# Altium PCB conn_board.PcbDoc (part 2 of 2)
Units mm, origin at the board's own origin, x right, y up, seen from the top; angles counter-clockwise.
Board outline 125 x 100 mm, 2 copper layers (Top Layer, Bottom Layer); 85 components, 65 nets, 284 pads, 72 vias.
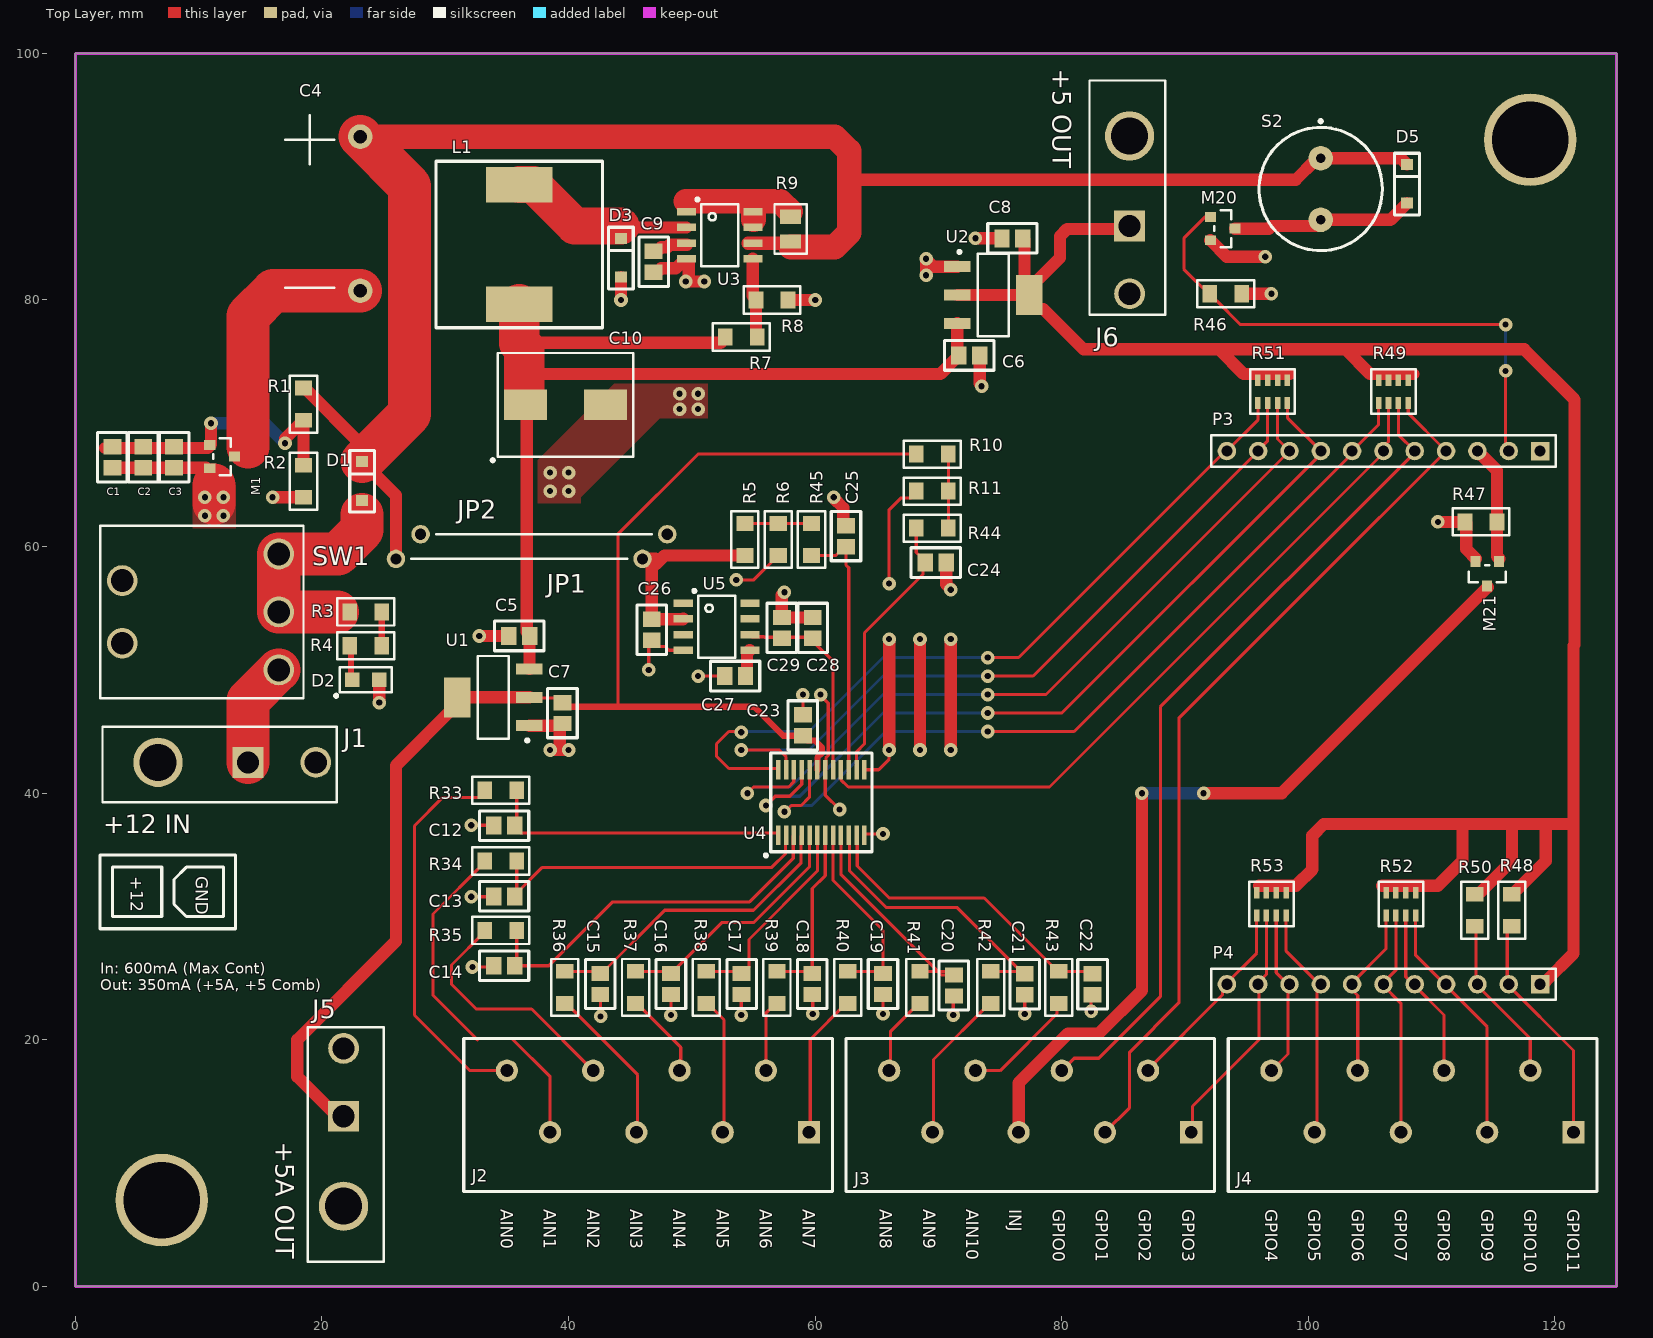
[diagram p0: Top Layer view]

## Part data (continued)
R2: library part ERJ-6ENF1603V, "Res Thick Film 0805 160K Ohm 1% 1/8W ±100ppm/°C Molded SMD Punched Carrier T/R", Case Code (Imperial)=0805, Case Code (Metric)=2012, Manufacturer=Panasonic, Max Operating Temperature=155°C, Max Power Dissipation=125mW, Min Operating Temperature=-55°C, Package Quantity=1, Supplier Part Number 1=P160KCCT-ND, Temperature Coefficient=100ppm/°C, Tolerance=1%, Voltage Rating=150V, Case/Package=0805, Category=Resistor, ComponentLink1Description=https://datasheet.ciiva.com/22674/1678782-22674517.pdf?src-supplier=Element14, ComponentLink1URL=https://datasheet.ciiva.com/22674/1678782-22674517.pdf?src-supplier=Element14, ComponentLink2Description=https://datasheet.ciiva.com/46436/1678782-46436469.pdf?src-supplier=Element14, ComponentLink2URL=https://datasheet.ciiva.com/46436/1678782-46436469.pdf?src-supplier=Element14, ComponentLink3Description=https://datasheet.ciiva.com/46436/1678782-46436470.pdf?src-supplier=Element14, ComponentLink3URL=https://datasheet.ciiva.com/46436/1678782-46436470.pdf?src-supplier=Element14, ComponentLink4Description=https://datasheet.ciiva.com/17207/aoa0000ce2-17207337.pdf?src-supplier=Avnet+Europe, ComponentLink4URL=https://datasheet.ciiva.com/17207/aoa0000ce2-17207337.pdf?src-supplier=Avnet+Europe, ComponentLink5Description=https://datasheet.ciiva.com/9185/aoa0000ce2-9185402.pdf?src-supplier=Avnet, ComponentLink5URL=https://datasheet.ciiva.com/9185/aoa0000ce2-9185402.pdf?src-supplier=Avnet, ComponentLink6Description=https://datasheet.ciiva.com/22739/1678782-22739739.pdf?src-supplier=Element14, ComponentLink6URL=https://datasheet.ciiva.com/22739/1678782-22739739.pdf?src-supplier=Element14, ComponentLink7Description=https://datasheet.ciiva.com/24060/aoa0000ce2-24060654.pdf?src-supplier=Mouser, ComponentLink7URL=https://datasheet.ciiva.com/24060/aoa0000ce2-24060654.pdf?src-supplier=Mouser, ComponentLink8Description=http://datasheet.octopart.com/ERJ-6ENF1603V-Panasonic-datasheet-13266541.pdf?src-supplier=Newark, ComponentLink8URL=http://datasheet.octopart.com/ERJ-6ENF1603V-Panasonic-datasheet-13266541.pdf?src-supplier=Newark, ComponentLink9Description=http://datasheet.octopart.com/ERJ-6ENF1603V-Panasonic-datasheet-48891056.pdf?src-supplier=Farnell, ComponentLink9URL=http://datasheet.octopart.com/ERJ-6ENF1603V-Panasonic-datasheet-48891056.pdf?src-supplier=Farnell, ComponentLink10Description=http://datasheet.octopart.com/ERJ-6ENF1603V-Panasonic-datasheet-136608610.pdf?src-supplier=Farnell, ComponentLink10URL=http://datasheet.octopart.com/ERJ-6ENF1603V-Panasonic-datasheet-136608610.pdf?src-supplier=Farnell, ComponentLink11Description=http://datasheet.octopart.com/ERJ6ENF1603V-Panasonic---ECG-datasheet-5313456.pdf?src-supplier=Element14, ComponentLink11URL=http://datasheet.octopart.com/ERJ6ENF1603V-Panasonic---ECG-datasheet-5313456.pdf?src-supplier=Element14, ComponentLink12Description=http://datasheet.octopart.com/ERJ6ENF1603V-Panasonic---ECG-datasheet-8853621.pdf?src-supplier=Element14, ComponentLink12URL=http://datasheet.octopart.com/ERJ6ENF1603V-Panasonic---ECG-datasheet-8853621.pdf?src-supplier=Element14, ComponentLink13Description=http://datasheet.octopart.com/ERJ6ENF1603V-Panasonic---ECG-datasheet-10025800.pdf?src-supplier=Element14, ComponentLink13URL=http://datasheet.octopart.com/ERJ6ENF1603V-Panasonic---ECG-datasheet-10025800.pdf?src-supplier=Element14, ComponentLink14Description=http://datasheet.octopart.com/ERJ-6ENF1603V-Panasonic-datasheet-41391857.pdf?src-supplier=Electro+Sonic, ComponentLink14URL=http://datasheet.octopart.com/ERJ-6ENF1603V-Panasonic-datasheet-41391857.pdf?src-supplier=Electro+Sonic, ComponentLink15Description=http://datasheet.octopart.com/ERJ-6ENF1603V-Panasonic-datasheet-78375410.pdf, ComponentLink15URL=http://datasheet.octopart.com/ERJ-6ENF1603V-Panasonic-datasheet-78375410.pdf, ComponentLink16Description=http://datasheet.octopart.com/ERJ6ENF1603V-Panasonic---ECG-datasheet-15994758.pdf?src-supplier=Farnell, ComponentLink16URL=http://datasheet.octopart.com/ERJ6ENF1603V-Panasonic---ECG-datasheet-15994758.pdf?src-supplier=Farnell, Composition="Thick Film", Contact Plating=Tin, Depth=1.25mm, Features="Automotive AEC-Q200", Height=0.028inch, Length=2mm, Manufacturer Part Number=ERJ-6ENF1603V, Military Standard=Not, Mount="Surface Mount", Number of Terminations=2, Packaging="Tape and Reel", Power Rating=125mW, Pricing 1="1=0.10000, 10=0.07200, 100=0.02750, 1000=0.01210, 2500=0.01045 (USD)", Radiation Hardening=No, REACH SVHC="No SVHC", Resistance=160kR, Stock 1=46420, Supplier 1=Digi-Key, Termination=SMD/SMT, Width=0.049inch
R3 R4 R33 R34 R35 R36 R37 R38 R39 R40 R41 R42 R43 R44 R45: library part ERA-6AED331V, "Res Thin Film 0805 330 Ohm 0.5% 0.125W(1/8W) ±25ppm/C Molded SMD Automotive Punched T/R", Case Code (Imperial)=0805, Case Code (Metric)=2012, Manufacturer=Panasonic, Max Operating Temperature=155°C, Min Operating Temperature=-55°C, Package Quantity=5000, Power Rating=125mW, Resistor Type="Thin Film", Supplier Part Number 1=P123837CT-ND, Temperature Coefficient=25ppm/°C, Tolerance=0.5%, Voltage Rating=200V, Case/Package=0805, Category=Resistor, ComponentLink1Description=https://datasheet.ciiva.com/24071/aoa0000ce26-197354-24071480.pdf?src-supplier=Mouser, ComponentLink1URL=https://datasheet.ciiva.com/24071/aoa0000ce26-197354-24071480.pdf?src-supplier=Mouser, ComponentLink2Description=https://datasheet.ciiva.com/9182/aoa0000ce26-9182970.pdf?src-supplier=Avnet, ComponentLink2URL=https://datasheet.ciiva.com/9182/aoa0000ce26-9182970.pdf?src-supplier=Avnet, Contact Plating=Tin, Depth=1.25mm, Height=0.5mm, Lead Free="Lead Free", Length=2mm, Manufacturer Part Number=ERA-6AED331V, Military Standard=Not, Mount="Surface Mount", Packaging="Tape and Reel", Pricing 1="1=0.10000, 10=0.09400, 25=0.06480, 50=0.05040, 100=0.03600, 250=0.02808, 500=0.02232, 1000=0.01584 (USD)", Resistance=330R, RoHS=Yes, Stock 1=11862, Supplier 1=Digi-Key, Termination=SMD/SMT, Width=1.25mm
R5 R7 R46 R47 R48 R50: library part ERA-6AED472V, "Res Thin Film 0805 4.7K Ohm 0.5% 0.125W(1/8W) ±25ppm/C Molded SMD Automotive Punched T/R", Case Code (Imperial)=0805, Case Code (Metric)=2012, Manufacturer=Panasonic, Max Operating Temperature=155°C, Min Operating Temperature=-55°C, Package Quantity=5000, Power Rating=125mW, Resistor Type="Metal Film,Thin Film", Supplier Part Number 1=P123914CT-ND, Temperature Coefficient=25ppm/°C, Tolerance=0.5%, Voltage Rating=100V, Case/Package=0805, Category="Chip SMD Resistors", ComponentLink1Description=https://datasheet.ciiva.com/24027/aoa0000ce26-32660-24027576.pdf?src-supplier=Mouser, ComponentLink1URL=https://datasheet.ciiva.com/24027/aoa0000ce26-32660-24027576.pdf?src-supplier=Mouser, Contact Plating=Tin, Depth=1.25mm, Height=0.5mm, Lead Free="Lead Free", Length=2mm, Manufacturer Part Number=ERA-6AED472V, Military Standard=Not, Mount="Surface Mount", Packaging="Tape and Reel", Pricing 1="1=0.10000, 10=0.09400, 100=0.03600, 1000=0.01584, 2500=0.01368 (USD)", Resistance=4.7kR, RoHS=Yes, Stock 1=25343, Supplier 1=Digi-Key, Width=1.25mm
R6 R8 R10 R11: library part ERJ-PB6D1241V, "RES SMD 1.24K OHM 0.5% 1/4W 0805", Case Code (Imperial)=0805, Case Code (Metric)=2012, Manufacturer=Panasonic, Max Operating Temperature=155°C, Max Power Dissipation=250mW, Min Operating Temperature=-55°C, Resistor Type="Thick Film", Supplier Part Number 1=P21029CT-ND, Temperature Coefficient=50ppm/°C, Tolerance=0.5%, Case/Package=0805, Category="Chip SMD Resistors", ComponentLink1Description=https://industrial.panasonic.com/sa/system/files/data/download/catalog/id_fixed-resistors_e_2.pdf?src-supplier=Digi-Key, ComponentLink1URL=https://industrial.panasonic.com/sa/system/files/data/download/catalog/id_fixed-resistors_e_2.pdf?src-supplier=Digi-Key, ComponentLink2Description=https://industrial.panasonic.com/cdbs/www-data/pdf/RDM0000/DMM0000COL5.pdf?src-supplier=Digi-Key, ComponentLink2URL=https://industrial.panasonic.com/cdbs/www-data/pdf/RDM0000/DMM0000COL5.pdf?src-supplier=Digi-Key, Features="Automotive AEC-Q200", Height - Seated (Max)=0.028inch, Length=0.079inch, Manufacturer Part Number=ERJ-PB6D1241V, Number of Terminations=2, Packaging="Tape and Reel", Pricing 1="1=0.23000, 10=0.19100, 25=0.13920, 50=0.10100, 100=0.07480, 250=0.05744, 500=0.04524, 1000=0.03132 (USD)", Resistance=1.24kR, RoHS=Yes, Stock 1=777, Supplier 1=Digi-Key, Width=0.049inch
R9: library part CSR1206FKR250, "Res Thick Film 1206 250m Ohm 1% 1/2W 100ppm/C Molded SMD Paper T/R", Case Code (Imperial)=1206, Case Code (Metric)=3216, Manufacturer="Stackpole Electronics", Max Operating Temperature=155°C, Max Power Dissipation=500mW, Min Operating Temperature=-55°C, Resistor Type="Thick Film", Supplier Part Number 1=CSR1206FKR250CT-ND, Temperature Coefficient=100ppm/°C, Tolerance=1%, Case/Package=1206, Category="Chip SMD Resistors", ComponentLink1Description=https://www.seielect.com/catalog/SEI-Packaging.pdf?src-supplier=Digi-Key, ComponentLink1URL=https://www.seielect.com/catalog/SEI-Packaging.pdf?src-supplier=Digi-Key, ComponentLink2Description=https://www.seielect.com/catalog/SEI-CSR_CSRN.pdf?src-supplier=Avnet+Asia, ComponentLink2URL=https://www.seielect.com/catalog/SEI-CSR_CSRN.pdf?src-supplier=Avnet+Asia, Contact Plating=Tin,Matte, Height=0.026inch, Lead Free="Lead Free", Length=0.12inch, Manufacturer Part Number=CSR1206FKR250, Mount="Surface Mount", Number of Terminations=2, Packaging="Tape and Reel", Power Rating=500mW, Pricing 1="1=0.41000, 10=0.31100, 25=0.23640, 50=0.17560, 100=0.13050, 250=0.11024, 500=0.09450 (USD)", Resistance=250mR, RoHS=Yes, Stock 1=244191, Supplier 1=Digi-Key, Termination=Wraparound, Width=0.061inch
R49 R51 R52 R53: library part CAY16-472J4LF, "RES ARRAY 4 RES 4.7K OHM 1206", Case Code (Imperial)=1206, Case Code (Metric)=3216, Manufacturer=Bourns, Max Operating Temperature=125°C, Min Operating Temperature=-55°C, Number of Resistors=4, Package Quantity=1, Power Per Element=62.5mW, Power Rating=248mW, Supplier Part Number 1=CAY16-472J4LFCT-ND, Temperature Coefficient=200ppm/°C, Tolerance=5%, Voltage Rating=50V, Case/Package=1206, Category=Resistor, Circuit Type=Isolated, ComponentLink1Description=https://datasheet.ciiva.com/19466/1979708-19466930.pdf?src-supplier=Jameco, ComponentLink1URL=https://datasheet.ciiva.com/19466/1979708-19466930.pdf?src-supplier=Jameco, ComponentLink2Description=https://datasheet.ciiva.com/11807/0900766b8064e462-11807155.pdf?src-supplier=RSComponents, ComponentLink2URL=https://datasheet.ciiva.com/11807/0900766b8064e462-11807155.pdf?src-supplier=RSComponents, ComponentLink3Description=https://datasheet.ciiva.com/1478/1849489-1478912.pdf?src-supplier=Element14, ComponentLink3URL=https://datasheet.ciiva.com/1478/1849489-1478912.pdf?src-supplier=Element14, ComponentLink4Description=https://datasheet.ciiva.com/25907/catcay-25907158.pdf?src-supplier=Avnet+Europe, ComponentLink4URL=https://datasheet.ciiva.com/25907/catcay-25907158.pdf?src-supplier=Avnet+Europe, ComponentLink5Description=https://datasheet.ciiva.com/30249/catcay-30249688.pdf?src-supplier=Onlinecomponents.com, ComponentLink5URL=https://datasheet.ciiva.com/30249/catcay-30249688.pdf?src-supplier=Onlinecomponents.com, ComponentLink6Description=https://datasheet.ciiva.com/6494/catcay-6494015.pdf?src-supplier=Digi-Key, ComponentLink6URL=https://datasheet.ciiva.com/6494/catcay-6494015.pdf?src-supplier=Digi-Key, ComponentLink7Description=https://datasheet.ciiva.com/3264/catcay-3264889.pdf?src-supplier=Avnet, ComponentLink7URL=https://datasheet.ciiva.com/3264/catcay-3264889.pdf?src-supplier=Avnet, ComponentLink8Description=https://datasheet.ciiva.com/3263/catcay-3263770.pdf?src-supplier=Avnet, ComponentLink8URL=https://datasheet.ciiva.com/3263/catcay-3263770.pdf?src-supplier=Avnet, ComponentLink9Description=https://datasheet.ciiva.com/1478/1849489-1478911.pdf?src-supplier=Element14, ComponentLink9URL=https://datasheet.ciiva.com/1478/1849489-1478911.pdf?src-supplier=Element14, Composition="Thick Film", Contact Plating=Tin, Depth=1.6mm, Height=0.024inch, Length=3.2mm, Manufacturer Part Number=CAY16-472J4LF, Military Standard=Not, Mount="Surface Mount", Number of Circuits=4, Number of Elements=4, Number of Pins=8, Number of Terminals=8, Packaging="Tape and Reel", Pricing 1="1=0.10000, 10=0.06900, 25=0.04760, 50=0.03720, 100=0.02650, 250=0.02068, 500=0.01644, 1000=0.01166 (USD)", Radiation Hardening=No, REACH SVHC="No SVHC", Resistance=4.7kR, RoHS=Yes, Stock 1=28152, Supplier 1=Digi-Key, Terminal Pitch=0.8mm, Termination=Convex, Voltage Rating (DC)=50V, Width=0.063inch
S2: "Buzzers Indicator, Internally Driven Magnetic 12V 30mA 2.7kHz 80dB @ 12V, 10cm Through Hole PC Pins", Manufacturer=CUI, Supplier Part Number 1=102-CMI-9605-1280T-ND, Category="Audio Products", Manufacturer Part Number=CMI-9605-1280T, Pricing 1="1=1.22000, 10=1.01900, 25=0.94360, 50=0.88800, 100=0.83460, 500=0.71806, 1000=0.67126, 5000=0.65780 (USD)", RoHS=No, Stock 1=2147, Supplier 1=Digi-Key
SW1: library part 100SP1T2B4M6QE, "Switch Toggle ON None ON SPDT Round Lever PC Pins 5A 250VAC 28VDC PC Mount with Bracket", Contact Resistance=100mR, Current Rating=5A, Manufacturer=E-Switch, Max Operating Temperature=85°C, Max Voltage Rating (AC)=250V, Max Voltage Rating (DC)=28V, Min Operating Temperature=-30°C, Package Quantity=1, Supplier Part Number 1=EG2362-ND, Voltage Rating (AC)=120V, Actuator Length=6.46mm, Actuator Material=Brass, Actuator Type="Standard Round", Category=Switch, ComponentLink1Description=https://datasheet.ciiva.com/2904/t111069-2904823.pdf?src-supplier=Digi-Key, ComponentLink1URL=https://datasheet.ciiva.com/2904/t111069-2904823.pdf?src-supplier=Digi-Key, ComponentLink2Description=https://datasheet.ciiva.com/16154/100-16154566.pdf?src-supplier=Onlinecomponents.com, ComponentLink2URL=https://datasheet.ciiva.com/16154/100-16154566.pdf?src-supplier=Onlinecomponents.com, ComponentLink3Description=http://datasheet.octopart.com/100SP1T2B4M6QE-E-Switch-datasheet-501321.pdf?src-supplier=Electro+Sonic, ComponentLink3URL=http://datasheet.octopart.com/100SP1T2B4M6QE-E-Switch-datasheet-501321.pdf?src-supplier=Electro+Sonic, ComponentLink4Description=http://datasheet.octopart.com/100SP1T2B4M6QE-E-Switch-datasheet-41351065.pdf?src-supplier=Farnell, ComponentLink4URL=http://datasheet.octopart.com/100SP1T2B4M6QE-E-Switch-datasheet-41351065.pdf?src-supplier=Farnell, ComponentLink5Description=http://datasheet.octopart.com/100SP1T2B4M6QE-E-Switch-datasheet-112052116.pdf?src-supplier=Electro+Sonic, ComponentLink5URL=http://datasheet.octopart.com/100SP1T2B4M6QE-E-Switch-datasheet-112052116.pdf?src-supplier=Electro+Sonic, ComponentLink6Description=http://datasheet.octopart.com/100SP1T2B4M6QE-E-Switch-datasheet-26830754.pdf?src-supplier=Electro+Sonic, ComponentLink6URL=http://datasheet.octopart.com/100SP1T2B4M6QE-E-Switch-datasheet-26830754.pdf?src-supplier=Electro+Sonic, ComponentLink7Description=http://datasheet.octopart.com/100SP1T2B4M6QE-E-Switch-datasheet-62101310.pdf?src-supplier=Electro+Sonic, ComponentLink7URL=http://datasheet.octopart.com/100SP1T2B4M6QE-E-Switch-datasheet-62101310.pdf?src-supplier=Electro+Sonic, Contact Material=Silver, Contact Plating=Silver, Electrical Life=40000Cycles, Housing Material="Stainless Steel", Illumination Type=Non-Illuminated, Lead Free="Lead Free", Length=12.7mm, Manufacturer Part Number=100SP1T2B4M6QE, Mount="Through Hole", Orientation="Right Angle", Packaging=Bulk, Pricing 1="1=3.01000, 10=2.69700, 25=2.54800, 50=2.43620, 100=2.31200, 250=2.21256, 500=2.03852, 1000=1.93908 (USD)", Stock 1=3257, Supplier 1=Digi-Key, Switch Function=On-On, Termination="PC Pin", Throw Configuration=SPDT, Voltage Rating (DC)=28V, Width=6.86mm
U1 U2: "LDL1117 Series 1.2 A 5 V High PSRR LDO Linear Voltage Regulator - SOT-223", Case/Package=TO-261-4, Dropout Voltage=600mV, Manufacturer=STMicroelectronics, Max Input Voltage=18V, Max Operating Temperature=125°C, Min Operating Temperature=-40°C, Min Output Voltage=5V, Output Current=1.2A, Power Supply Rejection Ratio (PSRR)=65dB, Quiescent Current=500uA, Supplier Part Number 1=497-17240-1-ND, Category=IC, ComponentLink1Description=http://www.farnell.com/datasheets/2259188.pdf?src-supplier=Farnell, ComponentLink1URL=http://www.farnell.com/datasheets/2259188.pdf?src-supplier=Farnell, ComponentLink2Description=http://www.st.com/content/ccc/resource/technical/document/datasheet/group3/0e/5a/00/ca/10/1a/4f/a5/DM00366442/files/DM00366442.pdf/jcr:content/translations/en.DM00366442.pdf?src-supplier=Digi-Key, ComponentLink2URL=http://www.st.com/content/ccc/resource/technical/document/datasheet/group3/0e/5a/00/ca/10/1a/4f/a5/DM00366442/files/DM00366442.pdf/jcr:content/translations/en.DM00366442.pdf?src-supplier=Digi-Key, ComponentLink3Description=http://www.farnell.com/datasheets/2259188.pdf?src-supplier=Newark, ComponentLink3URL=http://www.farnell.com/datasheets/2259188.pdf?src-supplier=Newark, ComponentLink4Description=http://datasheet.octopart.com/LDL1117S50R-STMicroelectronics-datasheet-82510909.pdf?src-supplier=Farnell, ComponentLink4URL=http://datasheet.octopart.com/LDL1117S50R-STMicroelectronics-datasheet-82510909.pdf?src-supplier=Farnell, ComponentLink5Description=http://datasheet.octopart.com/LDL1117S50R-STMicroelectronics-datasheet-93404513.pdf?src-supplier=Ciiva+Crawler, ComponentLink5URL=http://datasheet.octopart.com/LDL1117S50R-STMicroelectronics-datasheet-93404513.pdf?src-supplier=Ciiva+Crawler, Manufacturer Part Number=LDL1117S50R, Mount="Surface Mount", Number of Regulators=1, Output Configuration=Positive, Output Type=Fixed, Packaging="Tape and Reel", Pricing 1="1=0.48000, 10=0.36000, 25=0.32440, 100=0.17700, 250=0.17112, 500=0.15340, 1000=0.11800 (USD)", Stock 1=653, Supplier 1=Digi-Key
U3: "1.5-A peak boost/buck/inverting switching regulator 8-SOIC -40 to 85", Case/Package=D, Manufacturer="Texas Instruments", Max Input Voltage=40V, Max Operating Temperature=85°C, Max Output Current=750mA, Min Input Voltage=3V, Min Operating Temperature=-40°C, Min Output Voltage=1.25V, Output Current=1.5A, Package Quantity=1, Quiescent Current=4mA, Supplier Part Number 1=296-17763-1-ND, Switching Frequency=100kHz, Category=IC, ComponentLink1Description=https://datasheet.ciiva.com/41462/001014422-da-01-en-ic-reg-buck-boost-mc33063adr-soic-8-tid-41462284.pdf?src-supplier=Conrad, ComponentLink1URL=https://datasheet.ciiva.com/41462/001014422-da-01-en-ic-reg-buck-boost-mc33063adr-soic-8-tid-41462284.pdf?src-supplier=Conrad, ComponentLink2Description=https://datasheet.ciiva.com/26897/mc33063adr-26897702.pdf?src-supplier=IIIC, ComponentLink2URL=https://datasheet.ciiva.com/26897/mc33063adr-26897702.pdf?src-supplier=IIIC, ComponentLink3Description=https://datasheet.ciiva.com/7993/1862376-7993641.pdf?src-supplier=Element14, ComponentLink3URL=https://datasheet.ciiva.com/7993/1862376-7993641.pdf?src-supplier=Element14, ComponentLink4Description=https://datasheet.ciiva.com/7408/1862376-7408058.pdf?src-supplier=Newark, ComponentLink4URL=https://datasheet.ciiva.com/7408/1862376-7408058.pdf?src-supplier=Newark, ComponentLink5Description=https://datasheet.ciiva.com/46419/1803417-46419179.pdf?src-supplier=Element14, ComponentLink5URL=https://datasheet.ciiva.com/46419/1803417-46419179.pdf?src-supplier=Element14, ComponentLink6Description=https://datasheet.ciiva.com/2025/mc33063a-2025164.pdf?src-supplier=Digi-Key, ComponentLink6URL=https://datasheet.ciiva.com/2025/mc33063a-2025164.pdf?src-supplier=Digi-Key, ComponentLink7Description=https://datasheet.ciiva.com/2025/mc33063a-2025165.pdf?src-supplier=Digi-Key, ComponentLink7URL=https://datasheet.ciiva.com/2025/mc33063a-2025165.pdf?src-supplier=Digi-Key, ComponentLink8Description=https://datasheet.ciiva.com/2025/mc33063a-2025166.pdf?src-supplier=Digi-Key, ComponentLink8URL=https://datasheet.ciiva.com/2025/mc33063a-2025166.pdf?src-supplier=Digi-Key, ComponentLink9Description=https://octopart.com/click/track?ai=8629&ct=datasheets&sig=0128011&at=physicalpart&sid=370&ppid=525094&hlid=24898548&src-supplier=TI+store, ComponentLink9URL=https://octopart.com/click/track?ai=8629&ct=datasheets&sig=0128011&at=physicalpart&sid=370&ppid=525094&hlid=24898548&src-supplier=TI+store, ComponentLink10Description=http://datasheet.octopart.com/MC33063ADR-Texas-Instruments-datasheet-37140769.pdf?src-supplier=Farnell, ComponentLink10URL=http://datasheet.octopart.com/MC33063ADR-Texas-Instruments-datasheet-37140769.pdf?src-supplier=Farnell, ComponentLink11Description=http://datasheet.octopart.com/MC33063ADR-Texas-Instruments-datasheet-149237.pdf?src-supplier=TI+store, ComponentLink11URL=http://datasheet.octopart.com/MC33063ADR-Texas-Instruments-datasheet-149237.pdf?src-supplier=TI+store, ComponentLink12Description=http://datasheet.octopart.com/MC33063ADR-Texas-Instruments-datasheet-149238.pdf?src-supplier=TI+store, ComponentLink12URL=http://datasheet.octopart.com/MC33063ADR-Texas-Instruments-datasheet-149238.pdf?src-supplier=TI+store, ComponentLink13Description=http://datasheet.octopart.com/MC33063ADR-Texas-Instruments-datasheet-149239.pdf?src-supplier=TI+store, ComponentLink13URL=http://datasheet.octopart.com/MC33063ADR-Texas-Instruments-datasheet-149239.pdf?src-supplier=TI+store, ComponentLink14Description=http://datasheet.octopart.com/MC33063ADR-Texas-Instruments-datasheet-149240.pdf?src-supplier=TI+store, ComponentLink14URL=http://datasheet.octopart.com/MC33063ADR-Texas-Instruments-datasheet-149240.pdf?src-supplier=TI+store, ComponentLink15Description=http://datasheet.octopart.com/MC33063ADR-Texas-Instruments-datasheet-149241.pdf?src-supplier=TI+store, ComponentLink15URL=http://datasheet.octopart.com/MC33063ADR-Texas-Instruments-datasheet-149241.pdf?src-supplier=TI+store, ComponentLink16Description=http://datasheet.octopart.com/MC33063ADR-Texas-Instruments-datasheet-10254267.pdf?src-supplier=TI+store, ComponentLink16URL=http://datasheet.octopart.com/MC33063ADR-Texas-Instruments-datasheet-10254267.pdf?src-supplier=TI+store, ComponentLink17Description=http://sigma.octopart.com/49249642/technical_drawing/Texas-Instruments-MC33063ADR.pdf?src-supplier=TI+store, ComponentLink17URL=http://sigma.octopart.com/49249642/technical_drawing/Texas-Instruments-MC33063ADR.pdf?src-supplier=TI+store, ComponentLink18Description=http://datasheet.octopart.com/MC33063ADR-Texas-Instruments-datasheet-12606816.pdf?src-supplier=Farnell, ComponentLink18URL=http://datasheet.octopart.com/MC33063ADR-Texas-Instruments-datasheet-12606816.pdf?src-supplier=Farnell, ComponentLink19Description=http://datasheet.octopart.com/MC33063ADR-Texas-Instruments-datasheet-81639027.pdf?src-supplier=Farnell, ComponentLink19URL=http://datasheet.octopart.com/MC33063ADR-Texas-Instruments-datasheet-81639027.pdf?src-supplier=Farnell, ComponentLink20Description=http://datasheet.octopart.com/MC33063ADR-Texas-Instruments-datasheet-23714746.pdf?src-supplier=Newark, ComponentLink20URL=http://datasheet.octopart.com/MC33063ADR-Texas-Instruments-datasheet-23714746.pdf?src-supplier=Newark, ComponentLink21Description=http://datasheet.octopart.com/MC33063ADR-Texas-Instruments-datasheet-33038661.pdf?src-supplier=Element14, ComponentLink21URL=http://datasheet.octopart.com/MC33063ADR-Texas-Instruments-datasheet-33038661.pdf?src-supplier=Element14, ComponentLink22Description=http://datasheet.octopart.com/MC33063ADR.-Texas-Instruments-datasheet-58444985.pdf?src-supplier=Element14, ComponentLink22URL=http://datasheet.octopart.com/MC33063ADR.-Texas-Instruments-datasheet-58444985.pdf?src-supplier=Element14, ComponentLink23Description=http://datasheet.octopart.com/MC33063ADR.-Texas-Instruments-datasheet-65572232.pdf?src-supplier=Element14, ComponentLink23URL=http://datasheet.octopart.com/MC33063ADR.-Texas-Instruments-datasheet-65572232.pdf?src-supplier=Element14, ComponentLink24Description=http://datasheet.octopart.com/MC33063ADR-Texas-Instruments-datasheet-12052.pdf?src-supplier=Newark, ComponentLink24URL=http://datasheet.octopart.com/MC33063ADR-Texas-Instruments-datasheet-12052.pdf?src-supplier=Newark, ComponentLink25Description=http://datasheet.octopart.com/MC33063ADR-Texas-Instruments-datasheet-137654.pdf?src-supplier=Digi-Key, ComponentLink25URL=http://datasheet.octopart.com/MC33063ADR-Texas-Instruments-datasheet-137654.pdf?src-supplier=Digi-Key, ComponentLink26Description=http://datasheet.octopart.com/MC33063ADR-Texas-Instruments-datasheet-8883959.pdf?src-supplier=Element14, ComponentLink26URL=http://datasheet.octopart.com/MC33063ADR-Texas-Instruments-datasheet-8883959.pdf?src-supplier=Element14, ComponentLink27Description=http://datasheet.octopart.com/MC33063ADR-Texas-Instruments-datasheet-11768196.pdf?src-supplier=Arrow, ComponentLink27URL=http://datasheet.octopart.com/MC33063ADR-Texas-Instruments-datasheet-11768196.pdf?src-supplier=Arrow, ComponentLink28Description=http://datasheet.octopart.com/MC33063ADR-Texas-Instruments-datasheet-14045796.pdf?src-supplier=IIIC, ComponentLink28URL=http://datasheet.octopart.com/MC33063ADR-Texas-Instruments-datasheet-14045796.pdf?src-supplier=IIIC, Contact Plating=Gold, Lead Free="Lead Free", Manufacturer Part Number=MC33063ADR, Max Output Voltage=40V, Number of Outputs=1, Number of Pins=8, Output Type=Adjustable, Output Voltage=40V, Packaging="Tape and Reel", Pricing 1="1=0.44000, 10=0.37500, 25=0.35000, 100=0.26000, 250=0.22000, 500=0.21000, 1000=0.15500 (USD)", REACH SVHC="No SVHC", Stock 1=130093, Supplier 1=Digi-Key, Synchronous Rectifier=No, Termination=SMD/SMT, Topology=Flyback, Weight=0.002561oz
U4: "GLOVE, POLYAMIDE, L/FREE, PU, SIZE 6 - More Details", Case/Package=QSOP, Manufacturer=Maxim, Max Operating Temperature=85°C, Max Power Dissipation=762mW, Min Operating Temperature=-40°C, Operating Supply Voltage=5.25V, Package Quantity=50, Supplier Part Number 1=MAX11624EEG+-ND, Category=IC, ComponentLink1Description=https://datasheet.ciiva.com/16611/max11618-max11625-16611389.pdf?src-supplier=Avnet+Europe, ComponentLink1URL=https://datasheet.ciiva.com/16611/max11618-max11625-16611389.pdf?src-supplier=Avnet+Europe, ComponentLink2Description=https://datasheet.ciiva.com/3039/max11618-max11625-3039027.pdf?src-supplier=Avnet, ComponentLink2URL=https://datasheet.ciiva.com/3039/max11618-max11625-3039027.pdf?src-supplier=Avnet, Conversion Rate=300KS/s, Interface=SPI,Serial, Manufacturer Part Number=MAX11624EEG+, Mount="Surface Mount", Number of A/D Converters=1, Number of Analog Inputs=16, Number of Bits=10, Number of Channels=16, Number of Converters=1, Number of Pins=24, Packaging=Rail/Tube, Polarity=Unipolar, Pricing 1="1=6.76000, 10=6.11000, 25=5.82520, 100=4.83080, 250=4.82100 (USD)", Radiation Hardening=No, Resolution=10b, RoHS=Yes, Sampling Rate=300000S/s, Signal to Noise Ratio (SNR)=49dB, Stock 1=35, Supplier 1=Digi-Key, Supply Type=Single
U5: "TEXAS INSTRUMENTS - REF5050AIDR - VOLTAGE REF, SERIES, 5V, SOIC-8", Case/Package=D, Manufacturer="Texas Instruments", Max Input Voltage=18V, Max Operating Temperature=125°C, Max Output Current=10mA, Min Input Voltage=5.2V, Min Operating Temperature=-40°C, Min Output Voltage=5V, Nominal Supply Current=800uA, Operating Supply Current=1.2mA, Package Quantity=2500, Quiescent Current=1mA, Supplier Part Number 1=296-39167-1-ND, Temperature Coefficient=3ppm/°C, Tolerance=0.1%, Category="Voltage References", ComponentLink1Description=https://datasheet.ciiva.com/4065/43001021s8324725n7713-4065643.pdf?src-supplier=Arrow+Electronics, ComponentLink1URL=https://datasheet.ciiva.com/4065/43001021s8324725n7713-4065643.pdf?src-supplier=Arrow+Electronics, ComponentLink2Description=https://datasheet.ciiva.com/3236/ref5050-3236312.pdf?src-supplier=Avnet, ComponentLink2URL=https://datasheet.ciiva.com/3236/ref5050-3236312.pdf?src-supplier=Avnet, ComponentLink3Description=https://datasheet.ciiva.com/2012/ref5020-2012761.pdf?src-supplier=Digi-Key, ComponentLink3URL=https://datasheet.ciiva.com/2012/ref5020-2012761.pdf?src-supplier=Digi-Key, Lead Free="Lead Free", Manufacturer Part Number=REF5050AIDR, Number of Channels=1, Number of Pins=8, Output Current=10mA, Output Type=Fixed, Output Voltage=5V, Packaging="Tape and Reel", Pricing 1="1=2.92000, 10=2.61800, 25=2.47520, 100=2.03500, 250=1.82600, 500=1.76000, 1000=1.46300 (USD)", Radiation Hardening=No, REACH SVHC="No SVHC", Reference Type=Series, Reference Voltage=5V, RoHS=Yes, Stock 1=3640, Supplier 1=Digi-Key, Weight=0.002677oz

## Free pads (board coordinates)
  round 7.5 hole 6.2 unplated mask+0.06: MNT1(7,7) MNT2(118,93)

## Via types
v1: diameter 1.1, hole 0.5, Top Layer to Bottom Layer, 72 vias

## Nets (pads, with @x,y where several pads share a name; then routed paths per layer and width w, separated by ;. In a path a pad name is that pad's centre, name@x,y a point inside that pad or via, vN(x,y) a via of type N, cw(c..) or ccw(c..) an arc to the next point about the centre after c; other vN are vias at no path point)
5VREF: C28.2 C29.2 U4.17 U5.6 | length 16.5
  Top Layer w0.254: U5.6 54.873,52.692 55.852,52.692 55.894,52.65 57,52.65 59.5,52.65 59.6,52.65 60.098,52.152 60.098,52.052 61.452,50.697 U4.17
6VDCDC: C5.2 C6.2 C10.1 L1.1 R7.1 U1.3 U2.3 | length 84.8
  Top Layer w1: 36,76.525 52.325,76.525 52.7,76.9 R7.1 ; 36.4,74 70.15,74 71.425,75.275 71.525,75.275 71.65,75.4 C6.2 71.525,75.625 71.525,76.05 U2.3 ; C10.1 36.6,71.4 36.6,53.1 36.725,52.975 36.725,52.875 C5.2 36.837,52.738 36.837,50.088 U1.3
  Top Layer w3.3: L1.1 36,76.525 36,76.5 36.4,76.1 36.4,74 C10.1@36.4,72.1
12VDO: C4.1 C26.2 D1.1 D5.1 JP1.1 JP1.2 R1.1 R5.2 R9.1 S2.1 U3.6 U5.2 | length 163.3
  Top Layer w1: R1.1 18.6,72.85 23.25,68.2 D1.1 26,64.15 JP1.2 ; JP1.1 47.027,59 47.263,58.763 ; U5.2 49.282,54.117 46.767,54.117 C26.2 46.75,58.25 47.263,58.763 ; R5.2 47.777,59.277 47.263,58.763 ; 62.75,89.75 98.979,89.75 100.538,91.309 S2.1@100.729,91.309 ; S2.1 107.5,91.5 D5.1
  Top Layer w1.1: U3.6@54.575,84.615 U3.6 R9.1@57.41,84.615
  Top Layer w2: C4.1 61.578,93.25 62.75,92.078 62.75,89.75 62.75,85.472 61.578,84.3 R9.1@58.025,84.3
  Top Layer w3.5: C4.1 27.1,89.25 27.1,70.75 D1.1
+5: C8.2 J6.1 P4.1 R48.2 R49.2 R49.4 R49.6 R49.8 R50.2 R51.2 R51.4 R51.6 R51.8 R52.2 R52.4 R52.6 R52.8 R53.2 R53.4 R53.6 R53.8 U2.2 | length 185.1
  Top Layer w1: U2.2@71.525,80.4 76.975,80.4 U2.2@77.375,80.4 ; C8.2 76.975,84.875 U2.2@76.975,80.8 ; J6.1 85.25,85.75 80.436,85.75 79.85,85.164 79.85,83.425 77.375,80.95 U2.2@77.375,80.4 ; 96,32.5 99,32.5 100.321,33.821 100.321,36.571 101.25,37.5 112.5,37.5 ; 98.5,74 98.3,74 97.5,74 96.7,74 95.9,74 94.75,74 92.75,76 ; 106,32.5 110.5,32.5 112.5,34.5 112.5,37.5 ; 108.5,74 108.1,74 107.3,74 106.5,74 105.7,74 105,74 103,76 ; R50.2 113.6,31.9 113.9,31.9 116.518,34.518 116.518,37.5 ; R48.2 116.6,31.8 116.7,31.9 116.7,31.95 119.25,34.5 119.25,37.5 ; P4.1@118.747,24.577 118.92,24.75 119.25,24.75 121.5,27 121.5,37.5 ; U2.2@77.375,80.4 77.375,79.85 77.95,79.275 78.5,79.275 81.775,76 92.75,76 ; 92.75,76 103,76 ; 103,76 117.5,76 121.586,71.914 121.586,52.04 121.5,51.954 121.5,37.5 ; 112.5,37.5 116.518,37.5 ; 116.518,37.5 119.25,37.5 ; 119.25,37.5 121.5,37.5
+5A: C7.2 C23.1 J5.1 R10.2 U1.2 U4.19 | length 115.2
  Top Layer w0.254: U1.2@36.825,47.775 36.875,47.725 C7.2@39.025,47.725 ; 44,47 44,61 50.5,67.5 R10.2
  Top Layer w0.508: C7.2 39.85,47 44,47 55.068,47 57.418,44.65 C23.1 59.371,44.279 59.961,44.279 60.552,43.688 60.552,43.267 60.183,42.898 60.183,41.911 U4.19
  Top Layer w1: J5.1@22.067,13.233 21.25,14.05 20.95,14.05 18,17 18,20 26,28 26,42.25 30.65,46.9 30.975,47.225 30.975,47.775 U1.2@36.825,47.775
+12: D1.2 R3.2 SW1.2 SW1.3 | length 18.3
  Top Layer w3.5: 21.25,54.7 16.5,54.7 16.5,59.4 21.3,59.4 23.25,61.35 23.25,62.6
AIN0: J2.8 R33.1 | length 31.7
  Top Layer w0.254: R33.1 33.2,40.133 32.727,39.66 29.809,39.66 27.5,37.351 27.5,22 32,17.5 J2.8
AIN1: J2.7 R34.1 | length 29.5
  Top Layer w0.254: 32.6,20 32.5,20.1 ; R34.1 33.2,34.4 29,30.2 29,23.6 32.5,20.1 ; J2.7 38.5,17 35.4,20.1 32.5,20.1
AIN2: J2.6 R35.1 | length 19.9
  Top Layer w0.254: R35.1 33.2,28.769 30.5,26.069 30.5,24.5 32.5,22.5 37,22.5 J2.6
AIN3: J2.5 R36.1 | length 13
  Top Layer w0.254: R36.1 39.799,22.95 45.6,17.149 45.6,12.6 J2.5
AIN4: J2.4 R37.1 | length 7.1
  Top Layer w0.254: R37.1 45.532,22.95 49.1,19.382 49.1,17.6 J2.4
AIN5: J2.3 R38.1 | length 11.1
  Top Layer w0.254: R38.1 51.265,22.95 52.6,21.615 52.6,12.6 J2.3
AIN6: J2.2 R39.1 | length 5.8
  Top Layer w0.254: J2.2 56,22.152 R39.1@56.798,22.95
AIN7: J2.1 R40.1 | length 11.8
  Top Layer w0.254: J2.1 59.6,12.6 59.6,20.019 62.531,22.95 R40.1
AIN8: J3.8 R41.1 | length 6.5
  Top Layer w0.254: J3.8 66.1,17.6 66.1,20.65 68.4,22.95 R41.1
AIN9: J3.7 R42.1 | length 12.5
  Top Layer w0.254: J3.7 69.6,12.6 69.6,18.4 74.15,22.95 R42.1
AIN10: J3.6 R43.1 | length 9.4
  Top Layer w0.254: J3.6 75,17.5 79.618,22.118 79.618,22.818 R43.1
BUZZER: M20.G P3.2 R46.1 | length 44
  Top Layer w0.254: R46.1@92,80.4 89.9,82.5 89.9,85 91.64,86.74 M20.G ; R46.1 92.1,80.6 92.1,80.3 92.473,79.927 92.573,79.927 94.5,78 v1(116,78) ; v1(116,74.25) 116,68 P3.2
  Bottom Layer w0.254: v1(116,74.25) v1(116,78)
FAIN0: C12.2 R33.2 U4.1 | length 24.8
  Top Layer w0.254: R33.2 35.8,37.542 C12.2 35.623,37.265 36.121,36.767 56.954,36.767 57.007,36.714 U4.1
FAIN1: C13.2 R34.2 U4.2 | length 27.6
  Top Layer w0.254: C13.2 35.623,31.731 C13.2@35.8,31.908 ; R34.2 C13.2@35.8,31.908 ; U4.2 57.589,36.537 57.589,35.089 56.48,33.98 37.871,33.98 C13.2@35.8,31.908
FAIN2: C14.2 R35.2 U4.3 | length 31
  Top Layer w0.254: R35.2 35.8,26.177 C14.2 38.387,26 43.568,31.181 54.681,31.181 58.224,34.724 58.224,36.537 U4.3
FAIN3: C15.2 R36.2 U4.4 | length 25.2
  Top Layer w0.254: R36.2 42.391,25.55 C15.2 42.668,25.373 47.795,30.5 55,30.5 58.859,34.359 58.859,36.537 U4.4
FAIN4: C16.2 R37.2 U4.5 | length 20.4
  Top Layer w0.254: R37.2 48.124,25.55 C16.2 48.401,25.373 48.899,25.871 48.899,25.971 52.428,29.5 55,29.5 59.547,34.047 U4.5
FAIN5: C17.2 R38.2 U4.6 | length 16.8
  Top Layer w0.254: R38.2 53.857,25.55 53.953,25.453 C17.2 54.134,25.373 54.632,25.871 54.632,28.132 60.182,33.682 U4.6
FAIN6: C18.2 R39.2 U4.7 | length 14.6
  Top Layer w0.254: R39.2 59.59,25.55 C18.2 59.767,32.267 60.817,33.317 U4.7
FAIN7: C19.2 R40.2 U4.8 | length 15.8
  Top Layer w0.254: U4.8 61.452,32.918 65.5,28.87 C19.2 65.323,25.55 R40.2
FAIN8: C20.2 R41.2 U4.9 | length 18.6
  Top Layer w0.254: U4.9 62.087,33.413 69.95,25.55 ; R41.2 69.95,25.55 ; 69.95,25.55 70.85,25.55 70.95,25.55 C20.2 70.25,25.25 69.95,25.55
FAIN9: C21.2 R42.2 U4.10 | length 22.9
  Top Layer w0.254: U4.10 62.775,36.537 62.775,33.725 65.783,30.717 71.533,30.717 76.402,25.848 76.402,25.598 C21.2@76.45,25.55 ; R42.2 C21.2@76.45,25.55 ; C21.2 76.8,25.55 C21.2@76.45,25.55
FAIN10: C22.2 R43.2 U4.11 | length 25.2
  Top Layer w0.254: U4.11 63.41,36.537 63.41,34.09 66,31.5 73.7,31.5 79.65,25.55 82.3,25.55 C22.2
FAIN13: C24.2 R44.2 U4.14 | length 22.2
  Top Layer w0.254: U4.14 63.357,43.357 64,44 64,53 68.743,57.743 68.743,58.62 68.923,58.8 68.2,59.523 R44.2
FAIN14: C25.2 R45.2 U4.15 | length 21.3
  Top Layer w0.254: R45.2 61.677,59.277 62.4,60 C25.2 62.5,58.5 62.722,58.278 U4.15
GND: C1.1 C2.1 C3.1 C5.1 C6.1 C7.1 C8.1 C9.1 C10.2 C12.1 C13.1 C14.1 C15.1 C16.1 C17.1 C18.1 C19.1 C20.1 C21.1 C22.1 C23.2 C24.1 C25.1 C26.1 C27.1 C28.1 C29.1 D2.1 D3.2 J1.2 J5.2 J6.2 JP2.1 JP2.2 M1.S M20.S M21.S P3.1 R2.1 R6.2 R8.1 R11.1 R46.2 R47.2 U1.1 U2.1 U3.4 U4.12 U4.13 U4.18 U5.4 | length 146.9
  Top Layer w0.254: v1(32.1,31.6) 33.492,31.6 33.692,31.4 C13.1 ; v1(32.1,37.4) 33.888,37.4 C12.1 ; v1(32.2,25.9) 33.823,25.9 C14.1 ; C15.1 42.6,23.641 v1(42.6,21.9) ; v1(46.5,50) 46.5,52.15 C26.1 47.248,51.902 47.837,51.902 48.144,51.595 U5.4 ; v1(48.3,22) C16.1@48.3,23.672 ; v1(50.5,49.5) C27.1 ; v1(53.6,57.3) 55.023,57.3 R6.2 ; v1(54,22) 54,23.639 C17.1 ; C23.2 v1(59,48) ; C18.1 59.8,23.64 v1(59.8,22.1) ; v1(60.436,48) 60.436,47.931 61.06,47.307 61.06,43.057 60.87,42.867 60.87,41.963 U4.18 60.817,39.845 v1(61.985,38.677) ; U4.12 63.992,36.597 64.096,36.7 v1(65.5,36.7) ; U4.13 64.002,41.9 65.142,41.9 66,42.758 v1(66,43.5) ; v1(65.5,22.1) C19.1 ; v1(66,57) 66,63 66.927,63.927 67.727,63.927 68.2,64.4 R11.1 ; v1(71.2,22) 71.2,23.5 C20.1 ; v1(77,22.1) C21.1 ; v1(82.382,22.318) 82.382,23.532 C22.1
  Top Layer w1: C1.1 C2.1 C3.1 M1.S@10.6,66.4 ; v1(10.5,64) 11.25,64.75 ; v1(12,64) v1@12,64.027 ; v1(16,64) R2.1 ; v1(24.65,47.35) D2.1 ; v1(32.75,52.75) C5.1 ; U1.1 39.225,45.475 C7.1@39.275,45.525 ; v1(38.5,43.5) v1(40,43.5) ; 39.275,43.818 C7.1@39.275,45.525 ; C7.1 39.4,45.65 C7.1@39.275,45.525 ; v1(44.25,80) D3.2 ; C9.1@47.4,82.45 47.525,82.575 48.705,82.575 U3.4@49.275,83.145 ; v1(49.5,81.5) v1@49.752,81.5 ; U3.4@49.75,83.145 49.752,83.145 v1@49.752,81.5 ; v1(51,81.5) v1@49.752,81.5 ; R6.2 57.1,59.277 R6.2@57.2,59.177 ; v1(57.5,56.3) 57.5,56.273 57.3,56.073 C29.1 C28.1 ; R8.1 v1(60,80) ; v1(61.5,64) 61.5,63.927 62.275,63.152 62.275,61.825 62.4,61.7 C25.1 ; v1(66,43.5) v1(66,52.5) ; v1(68.5,43.5) v1(68.5,52.5) ; v1(69,82) v1@69,83.286 ; v1(69,83.339) v1@69,83.286 ; C24.1 70.623,56.95 71,56.573 v1(71,56.5) ; v1(71,43.5) v1(71,52.5) ; U2.1 69.586,82.7 v1@69,83.286 ; v1(73,85) C8.1 ; C6.1 73.35,73.223 73.5,73.073 v1(73.5,73) ; M20.S 93.39,83.5 v1(96.5,83.5) ; R46.2 v1(97,80.5) ; v1(110.5,62) R47.2 112.8,61.9 112.8,59.8 M21.S@113.6,59 ; P3.1@118.548,67.508 P3.1
  Top Layer w3.5: 11.25,63.5 11.25,64.75 11.25,65
  other v1: 10.5,62.5 12,62.5 38.5,64.5 40,64.5 38.5,66 40,66 49,71.15 50.5,71.15 49,72.4 50.5,72.4
GPIO0: J3.4 P3.5 R49.3 | length 67.7
  Top Layer w0.254: J3.4 81,18.5 83,18.5 88,23.5 88,47 108.5,67.5 P3.5@108.5,67.75 ; R49.3 107.3,69.08 108.565,67.815 P3.5
GPIO1: J3.3 P3.4 R49.1 | length 71.7
  Top Layer w0.254: J3.3 85.5,14.5 85.5,19 89.5,23 89.5,46.08 100.676,57.256 110.96,67.54 110.96,67.96 108.1,70.82 R49.1
GPIO2: J3.2 P4.11 R53.7 | length 16.3
  Top Layer w0.254: J3.2@86.843,17.443 93.039,23.639 93.039,24.269 95.8,27.03 R53.7
GPIO3: J3.1 P4.10 R53.5 | length 20
  Top Layer w0.254: J3.1@90.6,12.7 90.6,14.6 96,20 96,24.31 95.81,24.5 95.81,24.519 96.6,25.309 R53.5
GPIO4: J4.8 P4.9 R53.3 | length 13.7
  Top Layer w0.254: J4.8 98.35,18.85 P4.9@98.35,24.5 ; R53.3 97.4,25.45 P4.9@98.35,24.5 ; P4.9@98.5,24.35 P4.9@98.35,24.5
GPIO5: J4.7 P4.8 R53.1 | length 19.2
  Top Layer w0.254: R53.1 98.2,27.19 P4.8@100.89,24.5 ; J4.7 100.695,12.695 100.695,24.305 P4.8@100.89,24.5 ; P4.8@100.89,24.163 P4.8@100.89,24.5
GPIO6: J4.6 P4.7 R52.7 | length 14.3
  Top Layer w0.254: P4.7@103.64,24.29 P4.7@103.43,24.5 ; J4.6 104,23.593 103.43,24.163 P4.7@103.43,24.5 ; R52.7 106.3,27.37 P4.7@103.43,24.5
GPIO7: J4.5 P4.6 R52.5 | length 18.7
  Top Layer w0.254: R52.5 107.1,25.63 105.97,24.5 107.5,22.97 J4.5
GPIO8: J4.4 P4.5 R52.3 | length 13.9
  Top Layer w0.254: R52.3 107.9,25.11 108.51,24.5 111,22.01 J4.4
GPIO9: J4.3 P4.4 R52.1 | length 20
  Top Layer w0.254: R52.1 108.7,26.85 111.05,24.5 114.5,21.05 J4.3
GPIO10: J4.2 P4.3 R50.1 | length 13.6
  Top Layer w0.254: R50.1 113.59,29.11 113.59,24.5 117.99,20.1 117.99,17.51 J4.2
GPIO11: J4.1 P4.2 R48.1 | length 19.1
  Top Layer w0.254: R48.1 116.13,28.83 116.13,24.5 121.5,19.13 J4.1
INJ: J3.5 M21.D | length 68.1
  Top Layer w1: J3.5 76.5,16.5 80.5,20.5 83,20.5 86.5,24 v1(86.5,40) ; v1(91.5,40) 97.84,40 M21.D@114.55,56.71
  Bottom Layer w1: v1(86.5,40) v1(91.5,40)
INJSW: M21.G P3.3 R47.1 | length 9.5
  Top Layer w1: P3.3 113.71,67.748 115.3,66.158 R47.1 115.3,59.2 M21.G@115.5,59
NetC1_2: C1.2 C2.2 C3.2 M1.G R1.2 R2.2 | length 23.2
  Top Layer w0.254: R1.2@18.4,70.15 R1.2
  Top Layer w1: C1.2@2.42,68 10.725,68 11,68.275 v1(11,70) ; v1(17,68.375) 17,68.75 R1.2@18.4,70.15 ; R2.2 R1.2@18.5,70.2
  Bottom Layer w1: v1(11,70) 15.375,70 v1(17,68.375)
NetC4_2: C4.2 M1.D | length 20.6
  Top Layer w3.5: 14,68.083 14,78.7 16.05,80.75 C4.2@23.11,80.75
NetC9_2: C9.2 U3.3 | length 2.3
  Top Layer w1: C9.2@47.4,84.15 47.525,84.275 48.014,84.275 48.211,84.472 U3.3@49.6,84.472
NetC27_2: C27.2 U5.5 | length 2.3
  Top Layer w1: C27.2 54.475,49.625 54.475,51.395 54.675,51.595 U5.5
NetD2_2: D2.2 R4.1 | length 2.8
  Top Layer w0.5: R4.1 22.35,51.85 22.35,49.3 D2.2
NetD5_2: D5.2 M20.D S2.2 | length 14.6
  Top Layer w1: M20.D 96.785,85.79 96.995,86 S2.2@101,86 ; S2.2 106.65,86.5 D5.2
NetJ1_1: J1.1 SW1.1 | length 8.5
  Top Layer w3.5: J1.1 14,47.5 SW1.1@16.5,50
NetP3_6: P3.6 R49.5 U4.16 | length 60.5
  Top Layer w0.254: U4.16 62.087,41.103 62.69,40.5 79,40.5 106.09,67.59 106.09,68.087 106.5,68.497 R49.5
NetP3_7: P3.7 R49.7 U4.20 | length 67.8
  Top Layer w0.254: v1(57.5,38.5) 57.572,38.5 58.072,39 58.862,39 59.525,39.663 59.525,41.888 U4.20 ; v1(74,45) 81,45 P3.7@103.697,67.697 ; P3.7 105.7,69.9 R49.7
  Bottom Layer w0.254: v1(57.5,38.5) 58,39 59.724,39 65.724,45 v1(74,45)
NetP3_8: P3.8 R51.1 U4.21 | length 66.9
  Top Layer w0.254: v1(56,39) 56.75,39.75 57.933,39.75 58.912,40.729 U4.21 ; v1(74,46.5) 80,46.5 P3.8@101,67.5 ; R51.1 98.3,70.46 101,67.76 P3.8
  Bottom Layer w0.254: v1(56,39) 56.75,39.75 58.75,39.75 65.5,46.5 v1(74,46.5) ; P3.8@100.75,67.75 P3.8
NetP3_9: P3.9 R51.3 U4.22 | length 64.9
  Top Layer w0.254: v1(54.5,40) 55,40.5 57.846,40.5 58.261,40.915 58.261,41.894 U4.22 ; v1(74,48) 78.72,48 P3.9 97.5,68.72 R51.3
  Bottom Layer w0.254: v1(54.5,40) 55,40.5 58,40.5 65.5,48 v1(74,48)
NetP3_10: P3.10 R51.5 U4.23 | length 61.1
  Top Layer w0.254: v1(54,43.5) 57.083,43.5 57.642,42.94 U4.23 ; v1(74,49.5) 77.68,49.5 P3.10 96.06,67.88 96.06,67.94 96.7,68.579 R51.5
  Bottom Layer w0.254: v1(54,43.5) 59.5,43.5 65.5,49.5 v1(74,49.5)
NetP3_11: P3.11 R51.7 U4.24 | length 62.7
  Top Layer w0.254: v1(54,44.942) 53.942,45 53,45 52,44 52,43 53,42 56.954,42 57.007,41.947 U4.24 ; v1(74,51) 76.5,51 P3.11@93.32,67.82 ; P3.11 95.9,70.26 R51.7
  Bottom Layer w0.254: v1(54,44.942) 54.058,45 59.5,45 65.5,51 v1(74,51)
NetR3_1: R3.1 R4.2 | length 2.8
  Top Layer w0.5: R4.2 R3.1
NetR5_1: R5.1 R6.1 R45.1 | length 5.4
  Top Layer w0.254: R5.1 R6.1 R45.1
NetR7_2: R7.2 R8.2 U3.5 | length 6.4
  Top Layer w1: U3.5 54.95,80.35 55.2,80.1 R8.2 R7.2@55.2,77
NetR10_1: R10.1 R11.2 R44.1 | length 6
  Top Layer w0.254: R44.1 R11.2 R10.1
SWITCH_COLLECTOR: R9.2 U3.1 U3.7 U3.8 | length 10.3
  Top Layer w2: 49.5,88 55,88 ; 55,86.5 55,88 ; R9.2@58,87.175 57.175,88 55,88
SWITCH_EMITTER: D3.1 L1.2 U3.2 | length 15.5
  Top Layer w1: D3.1 45.135,85.885 U3.2
  Top Layer w1.2: 45.135,85.885 45.258,86.008
  Top Layer w3: L1.2 37.15,89.35 40.5,86 44.25,86
pads on no net: J1.MNT J5.MNT J6.MNT SW1.4 U5.1 U5.3 U5.7 U5.8

## Polygon pours and split planes (outlines as drawn)
GND on Top Layer "GND_L01_P006" (solid, pour order 6): 13,61.5 9.5,61.5 9.5,65 13,65
GND on Top Layer "GND_L01_P005" (solid, pour order 5): 37.5,67 43.7,73.2 51.3,73.2 51.3,70.4 47.4,70.4 41,64 41,63.5 37.5,63.5
GND on Bottom Layer "GND_L02_P003" (solid, pour order 3): 42,50 ccw(c42.5,50) 43,50 43,62 50.066,69.066 73.861,69.066 73.861,55.816 71.462,53.418 71.462,38.668 83.462,26.668 83.462,22.168 81.962,20.668 25.462,20.668 25.462,10.168 15.962,10.168 15.962,39.168 1.962,39.168 1.962,97.168 111.962,97.168 111.962,88.168 122.6,88.168 122.6,21.168 85.962,21.168 84.962,22.168 84.962,26.668 72.462,39.168 72.462,53.168 72.564,53.168 75.064,55.668 75.064,69.668 ccw(c74.462,69.668) 74.462,70.269 49.066,70.066 42,63

## Keep-outs
Keep-Out Layer:
  the board outline again, w0.254

## Other copper
Bottom Layer:
  pour cut-out: 22,39 22,45 25,45 29,51 29,70 30,70 30,50.5 25.5,44 23,44 23,38 0,38 0,39

## Silkscreen, mask and mechanical layers (free items; w line width, h text height)
Top Overlay:
  lines w0.2: 17,81 21,81 ; 17,93 21,93 ; 19,91 19,95
  lines w0.254: 2,29 13,29 13,35 2,35 2,29 ; 3,30 7,30 7,34 3,34 3,30 ; 8,31 9,30 12,30 12,34 9,34 8,33 8,31
  text "+5 OUT" at 79.254,98.746 h1.52 r270
  text "+12 IN" at 2.254,36.754 h1.52
  text "+12" at 4.504,33.246 h1 r270
  text "GND" at 9.754,33.246 h1 r270
  text "In: 600mA (Max Cont) / Out: 350mA (+5A, +5 Comb)" at 2,24 h0.9
  text "+5A OUT" at 16.254,11.746 h1.52 r270
  text "AIN0" at 34.504,6.246 h1 r270
  text "AIN1" at 38.004,6.246 h1 r270
  text "AIN2" at 41.504,6.246 h1 r270
  text "AIN3" at 45.004,6.246 h1 r270
  text "AIN4" at 48.504,6.246 h1 r270
  text "AIN5" at 52.004,6.246 h1 r270
  text "AIN6" at 55.504,6.246 h1 r270
  text "AIN7" at 59.004,6.246 h1 r270
  text "AIN8" at 65.254,6.246 h1 r270
  text "AIN9" at 68.754,6.246 h1 r270
  text "AIN10" at 72.254,6.246 h1 r270
  text "INJ" at 75.754,6.246 h1 r270
  text "GPIO0" at 79.254,6.246 h1 r270
  text "GPIO1" at 82.754,6.246 h1 r270
  text "GPIO2" at 86.254,6.246 h1 r270
  text "GPIO3" at 89.754,6.246 h1 r270
  text "GPIO4" at 96.504,6.246 h1 r270
  text "GPIO5" at 100.004,6.246 h1 r270
  text "GPIO6" at 103.504,6.246 h1 r270
  text "GPIO7" at 107.004,6.246 h1 r270
  text "GPIO8" at 110.504,6.246 h1 r270
  text "GPIO9" at 114.004,6.246 h1 r270
  text "GPIO10" at 117.504,6.246 h1 r270
  text "GPIO11" at 121.004,6.246 h1 r270